# Allegro board gumstix_breakout_mask.brd
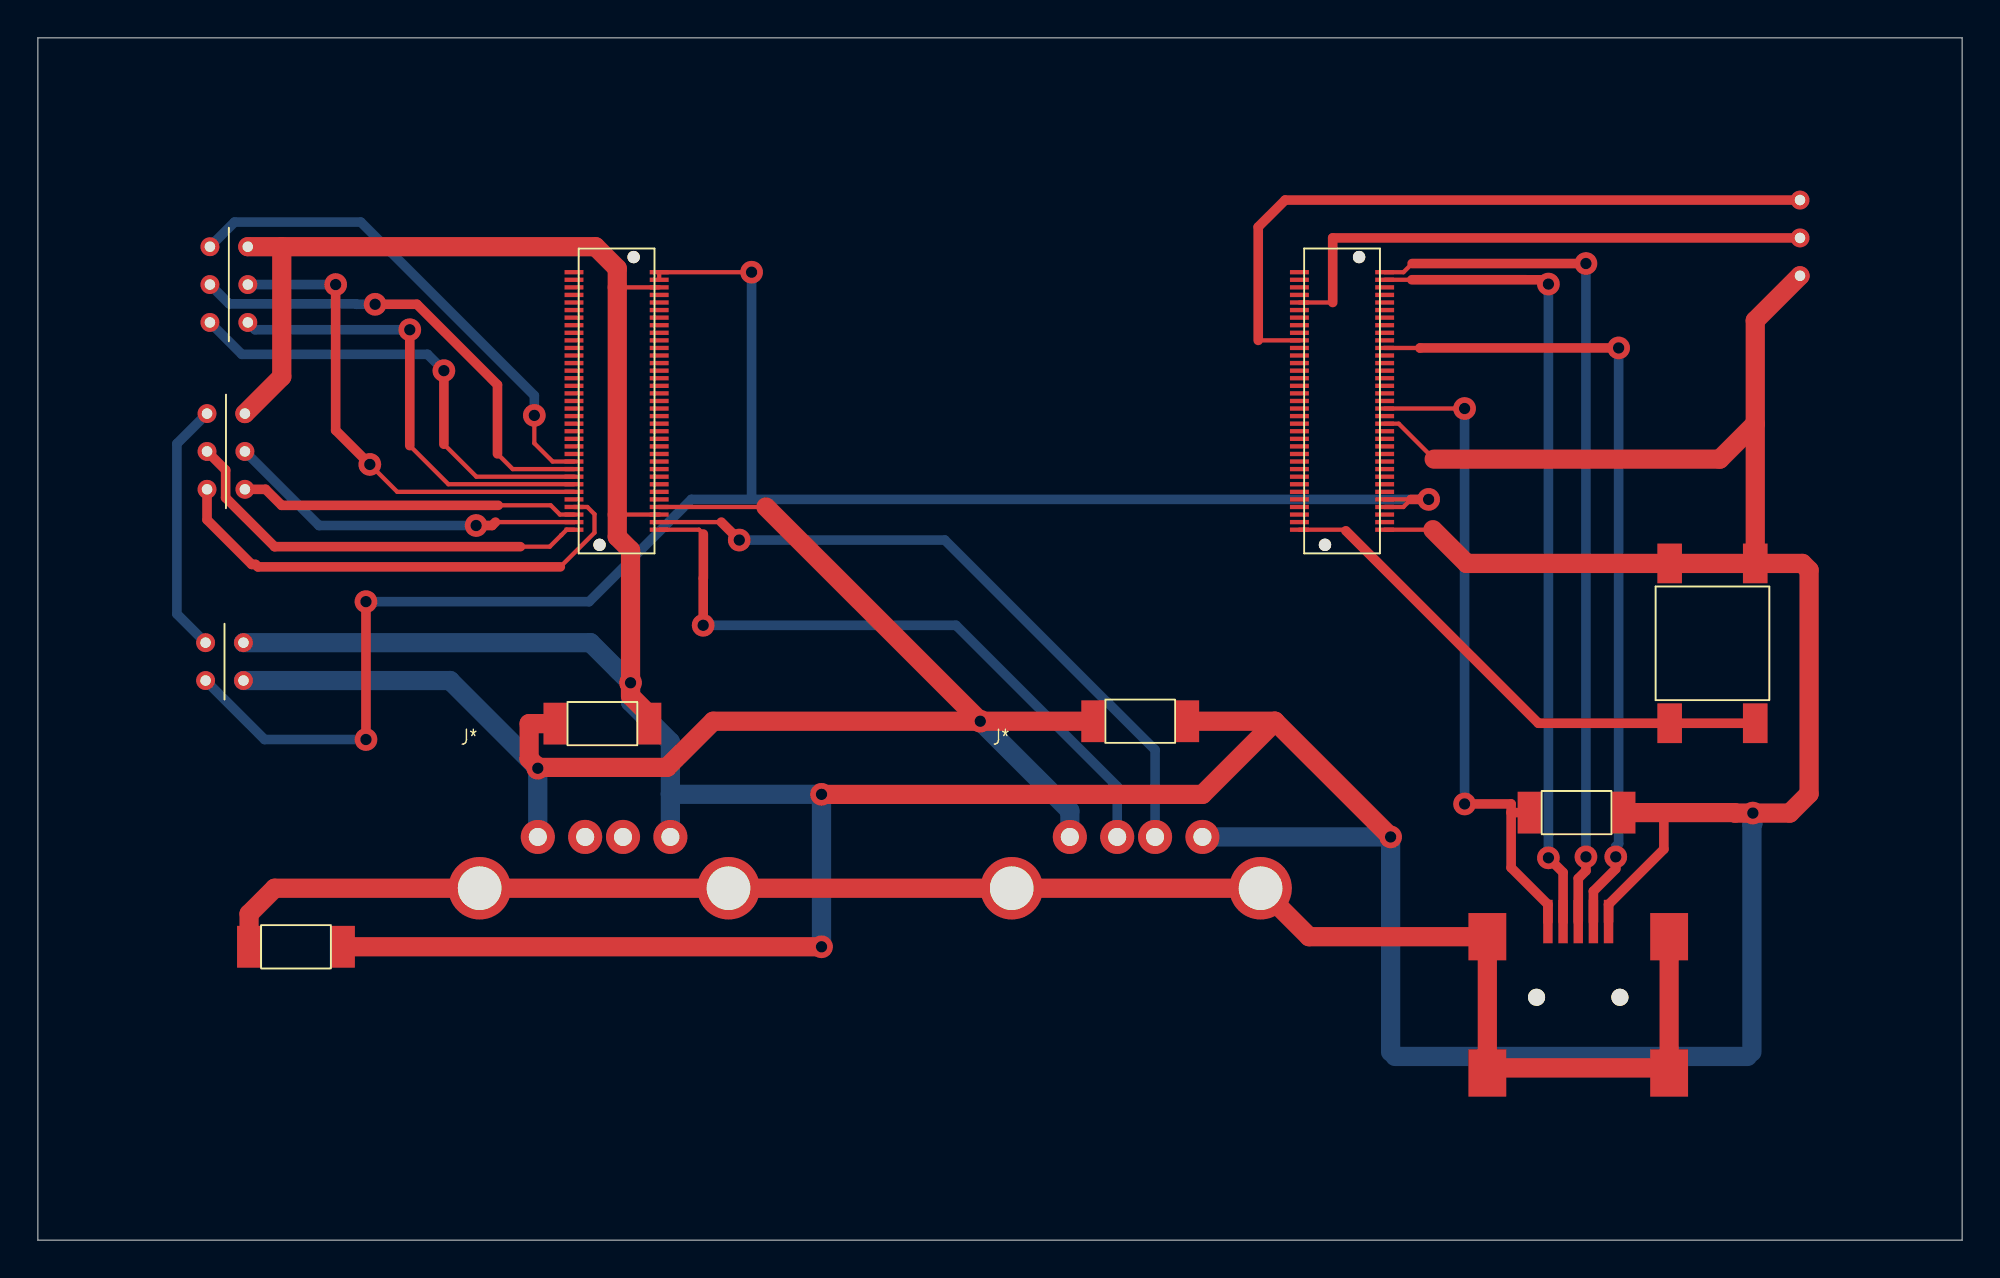
[diagram p0: board, top side]
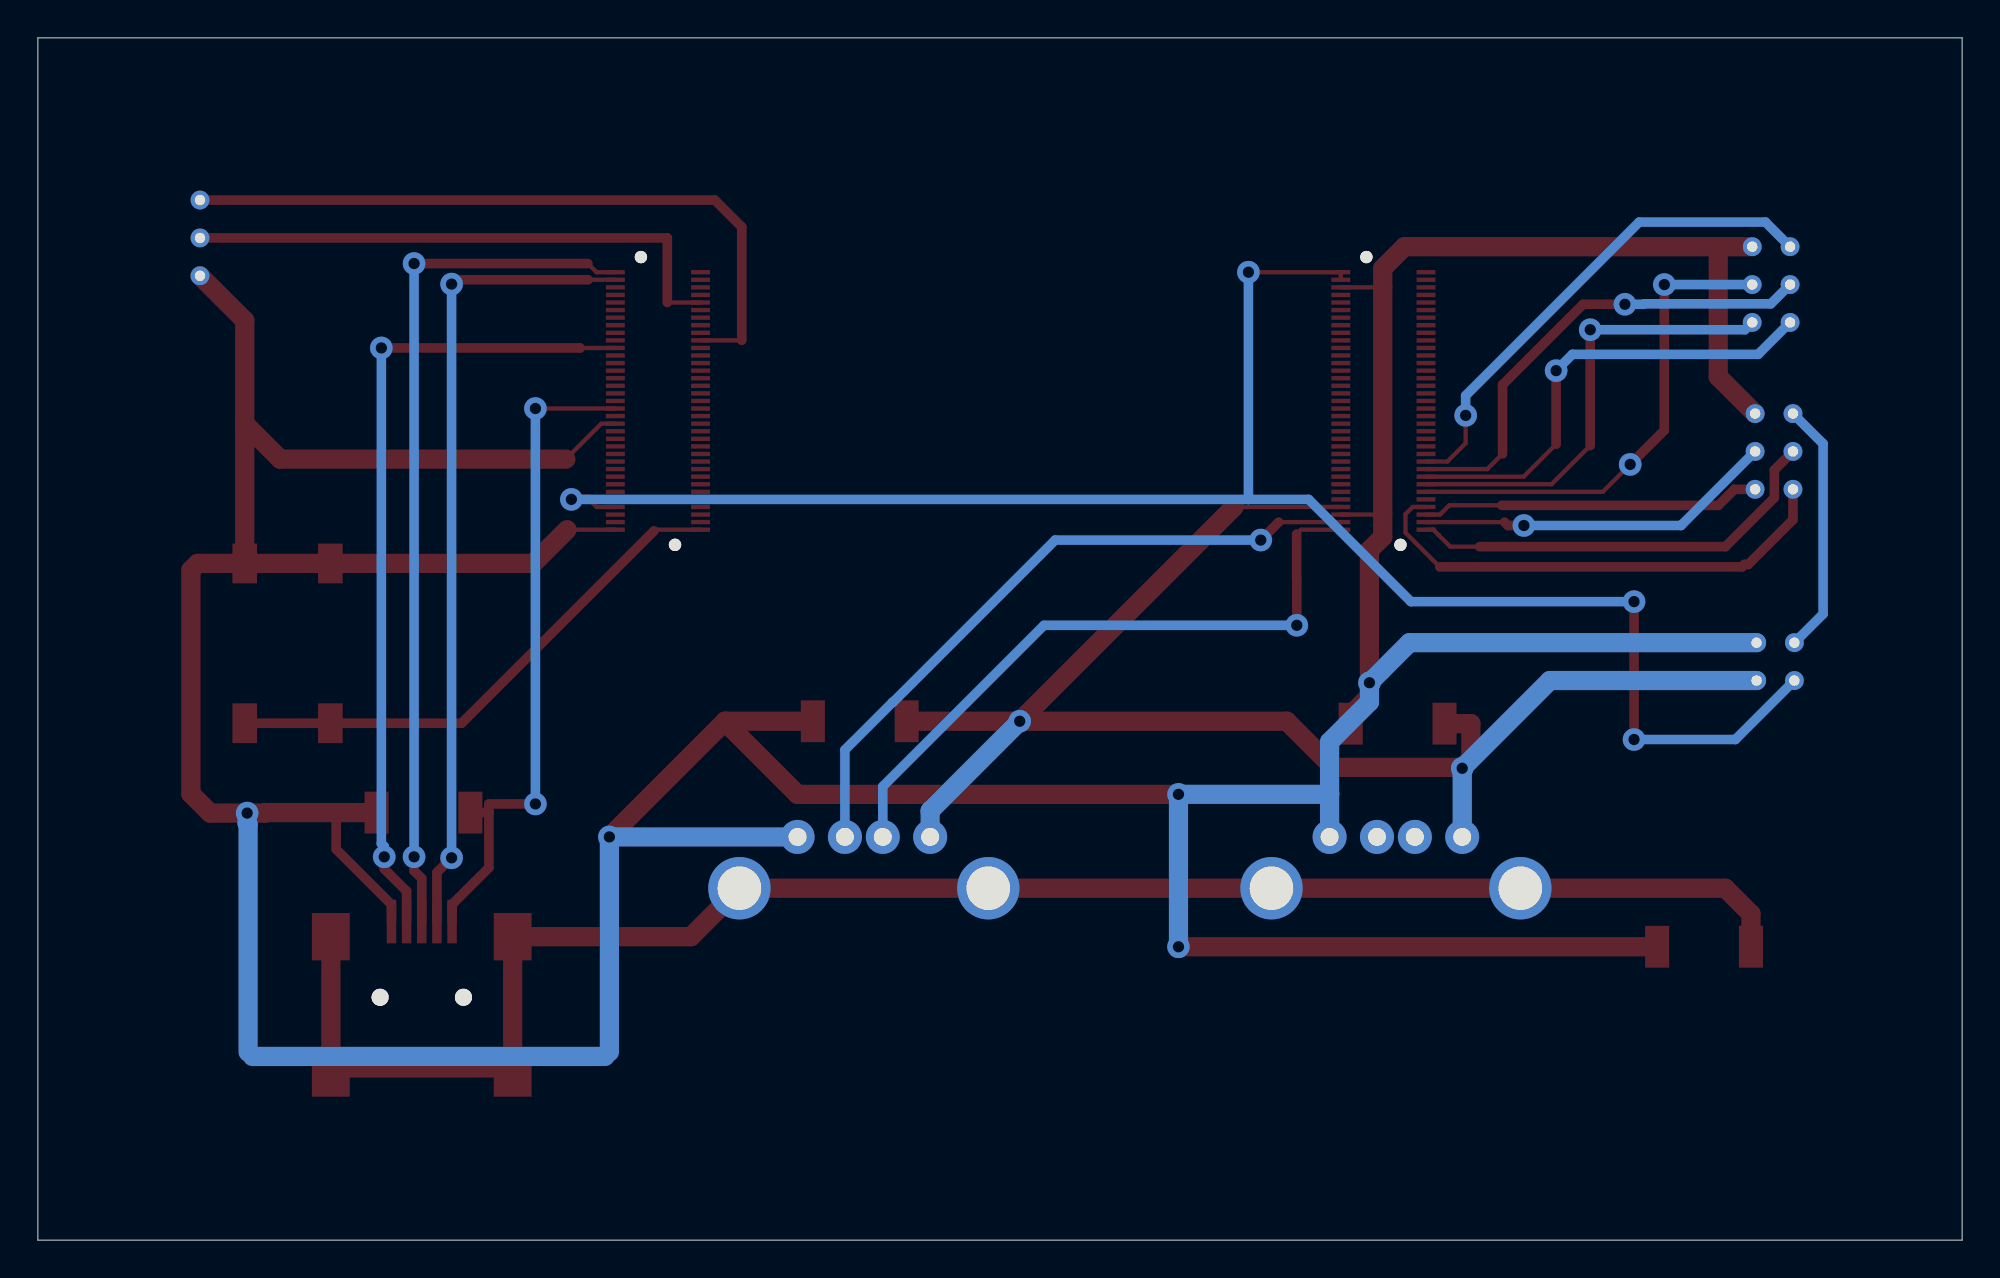
[diagram p1: board, bottom side, seen from below]

Outline 101.6 x 63.5 mm; copper layers: TOP, BOTTOM. Coordinates in mm from the lower left corner of the outline.
Outline path: 0,63.5 101.6,63.5 101.6,0 0,0 0,63.5

## Placement (name value [footprint] x y rotation side)
C1  1n  [SMDCAP]  13.69 15.49 0 top
C2  4.7u  [SMDCAP]  58.14 27.41 180 top
C3  4.7u  [SMDCAP]  29.74 27.28 180 top
C4  4.7u  [SMDCAP]  81.18 22.58 180 top
J1  GUMSTIX_J4  [GUMSTIX]  30.56 44.32 0 top
J2  GUMSTIX_J1  [GUMSTIX]  68.86 44.32 180 top
J3  CON6  [USBA]  57.99 14.05 0 top
J4  CON6  [USBA]  29.9 14.05 0 top
J5  CON9  [MUSBA_TSMT]  81.33 12.83 90 top
J6  CON6  [DIP6_CONN]  10.08 50.47 0 top
J7  CON3  [DIP3]  93.04 52.93 0 top
J8  CON6  [DIP6_CONN]  9.93 41.66 0 top
J9  CON4  [DIP4_CONN]  9.86 30.56 0 top
S1  -  [SWITCH]  88.42 31.52 270 top

## Library data of the parts
C1-C4 = C_elect_0: Tolerance: ***; User Part Number: ***
J1 = GUMSTIX_J4
J2 = GUMSTIX_J1
J3 J4 J6 J8 = CON6
J5 = CON9
J7 = CON3
J9 = CON4
S1 = SWITCH

## Footprints (pads in the part's own frame, mm; a bottom-side part is the same pattern mirrored in y, then rotated)
DIP3
  round 1 hole 0.55 unplated: (0,2) (0,0) (0,-2)
DIP4_CONN
  round 1 hole 0.55 unplated: (-1,1) (-1,-1) (1,1) (1,-1)
DIP6_CONN
  round 1 hole 0.55 unplated: (-1,2) (-1,0) (-1,-2) (1,2) (1,0) (1,-2)
GUMSTIX
  round 0.65 hole 0.65 unplated: (-0.9,-7.6) (0.9,7.6)
  rect 1x0.23 smd: 1(2.25,6.8) 2(2.25,6.4) 3(2.25,6) 4(2.25,5.6) 5(2.25,5.2) 6(2.25,4.8) 7(2.25,4.4) 8(2.25,4) 9(2.25,3.6) 10(2.25,3.2) 11(2.25,2.8) 12(2.25,2.4) 13(2.25,2) 14(2.25,1.6) 15(2.25,1.2) 16(2.25,0.8) 17(2.25,0.4) 18(2.25,0) 19(2.25,-0.4) 20(2.25,-0.8) 21(2.25,-1.2) 22(2.25,-1.6) 23(2.25,-2) 24(2.25,-2.4) 25(2.25,-2.8) 26(2.25,-3.2) 27(2.25,-3.6) 28(2.25,-4) 29(2.25,-4.4) 30(2.25,-4.8) 31(2.25,-5.2) 32(2.25,-5.6) 33(2.25,-6) 34(2.25,-6.4) 35(2.25,-6.8) 36(-2.25,-6.8) 37(-2.25,-6.4) 38(-2.25,-6) 39(-2.25,-5.6) 40(-2.25,-5.2) 41(-2.25,-4.8) 42(-2.25,-4.4) 43(-2.25,-4) 44(-2.25,-3.6) 45(-2.25,-3.2) 46(-2.25,-2.8) 47(-2.25,-2.4) 48(-2.25,-2) 49(-2.25,-1.6) 50(-2.25,-1.2) 51(-2.25,-0.8) 52(-2.25,-0.4) 53(-2.25,0) 54(-2.25,0.4) 55(-2.25,0.8) 56(-2.25,1.2) 57(-2.25,1.6) 58(-2.25,2) 59(-2.25,2.4) 60(-2.25,2.8) 61(-2.25,3.2) 62(-2.25,3.6) 63(-2.25,4) 64(-2.25,4.4) 65(-2.25,4.8) 66(-2.25,5.2) 67(-2.25,5.6) 68(-2.25,6) 69(-2.25,6.4) 70(-2.25,6.8)
MUSBA_TSMT
  round 0.9 hole 0.9 unplated: (0,2.2) (0,-2.2)
  rect 2.3x0.5 smd: 1(4,1.6) 2(4,0.8) 3(4,0) 4(4,-0.8) 5(4,-1.6)
  rect 2.5x2 smd: 6(-4,4.8) 7(-4,-4.8) 8(3.2,-4.8) 9(3.2,4.8)
SMDCAP
  rect 1.27x2.21 smd: 1(-2.54,0) 2(2.413,0)
SWITCH
  rect 2.1x1.3 smd: 1(-4.22,2.26) 2(-4.22,-2.26) 3(4.22,-2.26) 4(4.22,2.26)
USBA
  round 3.3 hole 2.3 unplated: (-6.57,4.54) (6.57,4.54)
  round 1.8 hole 0.95 unplated: (-3.5,7.25) (-1,7.25) (1,7.25) (3.5,7.25)

## Nets
GND: C1.2(-) C2.1(+) C3.1(+) C4.1(+) J1.3(GND#3) J1.33(GND#33) J2.56(GND#56) J2.70(GND#70) J5.5 S1.1 S1.2
VCC_3.3: J1.1(VSYSTEM#1) J1.2(VSYSTEM#2) J2.66(VSYSTEM#66) J2.67(VSYSTEM#67)
COMMON_SHIELD: C1.1(+) J5.6 J5.7 J5.8 J5.9
GPIO18: J1.38(GPIO23_MMC3_DAT5)
GPIO19: J1.36(GPIO19_MMC3_D1)
GPIO20: J1.39(GPIO20_MMC3_D2)
GPIO21: J1.37(GPIO22_MMC3_DAT6)
GPIO165_IR_RXD3: J2.31(GPIO165_IR_RXD3)
GPIO166_IR_TXD3: J2.26(GPIO166_IR_TXD3)
SPI_CLOCK_1.8V: J1.43(GPIO171_SPI1_CLK)
SPI_CS_1.8V: J1.42(GPIO175_SPI1_CS1)
SPI_INTERRUPT_1.8V: J1.41(GPIO114_SPI1_NIRQ)
SPI_MISO_1.8V: J1.45(GPIO173_SPI1_MISO)
SPI_MOSI_1.8V: J1.44(GPIO172_SPI1_MOSI)
USB_OTG_DM: J2.37(USBOTG_DM) J5.2
USB_OTG_DP: J2.36(USBOTG_DP) J5.3
USB_OTG_ID: J2.46(USBOTG_ID) J5.4
USB_OTG_VBUS: C4.2(-) J2.54(USBOTG_VBUS) J5.1
USBH_DM: J1.35(USBH_DM)
USBH_DP: J1.34(USBH_DP)
USBH_VBUS: C2.2(-) C3.2(-) J1.32(USBH_VBUS)
N00742: J2.1(NRESPWRON) S1.3 S1.4

Pads without a net: J1 4 5 6 7 8 9 10 11 12 13 14 15 16 17 18 19 20 21 22 23 24 25 26 27 28 29 30 31 40 46 47 48 49 50 51 52 53 54 55 56 57 58 59 60 61 62 63 64 65 66 67 68 69 70; J2 2 3 4 5 6 7 8 9 10 11 12 13 14 15 16 17 18 19 20 21 22 23 24 25 27 28 29 30 32 33 34 35 38 39 40 41 42 43 44 45 47 48 49 50 51 52 53 55 57 58 59 60 61 62 63 64 65 68 69

## Via types
v1: diameter 1.2, hole 0.6, TOP to BOTTOM, 28 vias

## Routing (per net, layer and track width the routed paths; a pad name or vN(x,y) marks a point on that pad's centre or on a via; arc(x,y) is an arc through that point)
GND: length 312.1
  TOP w0.229: J1.3 30.59,50.32 ; J2.70 73.66,37.52 ; J2.56 71.85,43.12 73.72,41.25 ; J1.33 30.59,38.32
  TOP w0.508: J5.5 82.93,17.73 85.85,20.65 85.85,22.58
  TOP w1.016: S1.1 93.16,35.74 93.52,35.39 93.52,23.58 92.5,22.56 v1(90.55,22.56) 89.61,22.56 89.59,22.58 C4.1 ; S1.1 90.68,43.12 ; S1.1 S1.2 75.44,35.74 73.66,37.52 ; 12.88,52.47 29.44,52.47 30.59,51.32 30.59,37.14 31.29,36.44 v1(31.29,29.44) 31.29,28.74 32.28,27.75 C3.1 ; 12.88,52.47 12.88,45.6 10.93,43.66 ; 12.88,52.47 11.08,52.47 ; 65.31,27.41 v1(71.42,21.3) ; 65.31,27.41 65.31,27.37 61.49,23.54 41.37,23.54 v1(41.38,23.55) ; 65.31,27.41 C2.1 ; 93.04,50.93 90.68,48.57 90.68,43.12 ; 90.68,43.12 88.8,41.25 73.72,41.25 ; C1.2 v1(41.38,15.49)
  BOTTOM w0.229: 71.42,9.93 71.65,9.7 ; 90.27,9.7 90.5,9.93
  BOTTOM w1.016: 71.65,9.7 90.27,9.7 ; v1(41.38,15.49) v1(41.38,23.55) 33.41,23.55 33.4,23.56 ; 33.4,21.3 33.4,23.56 ; 33.4,23.56 33.4,26.32 31.29,28.42 v1(31.29,29.44) 29.18,31.56 10.86,31.56 ; v1(90.55,22.56) 90.55,22.01 90.5,21.96 90.5,9.93 ; 71.42,9.93 v1(71.42,21.3) 61.49,21.3
VCC_1.8: length 13.4
  BOTTOM w0.508: 8.86,31.56 7.34,33.07 7.34,42.07 8.93,43.66
VCC_3.3: length 96.5
  TOP w0.229: J2.66 72.5,39.12 72.1,38.72 J2.67 ; v1(37.68,51.12) J1.1 J1.2
  TOP w0.508: 72.5,39.12 v1(73.43,39.12) ; v1(17.32,33.72) v1(17.32,26.44)
  BOTTOM w0.508: v1(17.32,33.72) 29.1,33.72 34.5,39.12 37.68,39.12 ; 8.86,29.56 11.97,26.44 v1(17.32,26.44) ; 37.68,39.12 v1(73.43,39.12) ; 37.68,39.12 v1(37.68,51.12)
COMMON_SHIELD: length 92.9
  TOP w1.016: 86.13,9.09 76.8,9.09 J5.6 J5.9 67.12,16.03 64.56,18.59 12.5,18.59 11.15,17.23 C1.1 ; 86.13,9.09 J5.7 ; 86.13,9.09 J5.8
GPIO18: length 17.9
  TOP w0.229: 24.31,38.81 27.08,38.81 27.56,38.32 J1.38
  TOP w0.508: 10.93,39.66 12.02,39.66 12.87,38.81 24.31,38.81
GPIO19: length 22.7
  TOP w0.229: J1.36 27.92,37.52 27.64,37.24 27.64,37.24 27.03,36.63 25.48,36.63
  TOP w0.508: 25.48,36.63 12.5,36.63 9.91,39.21 9.91,40.67 8.93,41.66
GPIO20: length 26.1
  TOP w0.229: J1.39 29.01,38.72 29.39,38.34 29.39,37.37 27.58,35.56
  TOP w0.508: 27.58,35.56 11.62,35.56 11.49,35.69 11.29,35.69 8.93,38.05 8.93,39.66
GPIO21: length 19.1
  TOP w0.229: J1.37 24.16,37.92
  TOP w0.508: v1(23.14,37.74) 23.98,37.74 24.16,37.92
  BOTTOM w0.508: v1(23.14,37.74) 14.84,37.74 10.93,41.66
GPIO165_IR_RXD3: length 29.8
  TOP w0.229: J2.31 68.37,49.52
  TOP w0.508: 93.04,52.93 68.37,52.93 68.37,49.52
GPIO166_IR_TXD3: length 37.4
  TOP w0.229: J2.26 64.43,47.52
  TOP w0.508: 93.04,54.93 65.86,54.93 64.43,53.51 64.43,47.52
SPI_CLOCK_1.8V: length 24.9
  TOP w0.229: J1.43 23.15,40.32 21.44,42.04
  TOP w0.508: v1(21.44,45.92) 21.44,42.04
  BOTTOM w0.508: 9.08,48.47 10.77,46.79 20.58,46.79 v1(21.44,45.92)
SPI_CS_1.8V: length 24.3
  TOP w0.229: 19.64,41.96 21.68,39.92 J1.42
  TOP w0.508: v1(19.64,48.08) 19.64,41.96
  BOTTOM w0.508: v1(19.64,48.08) 11.47,48.08 11.08,48.47
SPI_INTERRUPT_1.8V: length 26.3
  TOP w0.229: v1(17.53,40.97) 18.97,39.52 J1.41
  TOP w0.508: v1(15.72,50.47) 15.72,42.77 v1(17.53,40.97)
  BOTTOM w0.508: 11.08,50.47 v1(15.72,50.47)
SPI_MISO_1.8V: length 26.5
  TOP w0.229: J1.45 27.18,41.12 26.21,42.09 v1(26.21,43.56)
  BOTTOM w0.508: v1(26.21,43.56) 26.21,44.61 17.05,53.77 10.38,53.77 9.08,52.47
SPI_MOSI_1.8V: length 25.4
  TOP w0.229: 24.27,41.53 25.07,40.72 J1.44
  TOP w0.508: 24.27,41.53 24.27,45.17 20.01,49.43 v1(17.81,49.43)
  BOTTOM w0.508: v1(17.81,49.43) 16.82,49.43 16.8,49.45 10.1,49.45 9.08,50.47
USB_OTG_DM: length 42.7
  TOP w0.229: J2.37 72.54,50.72
  TOP w0.508: v1(79.76,20.19) 80.53,19.42 J5.2 ; v1(79.76,50.5) 79.53,50.72 72.54,50.72
  BOTTOM w0.508: v1(79.76,50.5) v1(79.76,20.19)
USB_OTG_DP: length 45.7
  TOP w0.229: 72.56,51.58 72.1,51.12 J2.36
  TOP w0.508: 72.56,51.58 v1(81.74,51.58) ; J5.3 81.33,19.1 81.74,19.51 v1(81.74,20.24)
  BOTTOM w0.508: v1(81.74,51.58) v1(81.74,20.24)
USB_OTG_ID: length 43.2
  TOP w0.229: 72.97,47.12 72.97,47.12 J2.46
  TOP w0.508: v1(83.31,20.24) 83.31,19.61 82.13,18.43 J5.4 ; v1(83.46,47.12) 72.98,47.12 72.97,47.12
  BOTTOM w0.508: v1(83.46,47.12) 83.46,20.94 83.31,20.79 v1(83.31,20.24)
USB_OTG_VBUS: length 35.6
  TOP w0.229: J2.54 v1(75.33,43.92)
  TOP w0.508: 77.79,22.58 77.79,23.04 v1(75.33,23.04) ; 77.79,22.58 77.79,19.67 79.73,17.73 J5.1 ; 77.79,22.58 C4.2
  BOTTOM w0.508: v1(75.33,43.92) v1(75.33,23.04)
USBH_DM: length 35.3
  TOP w0.229: J1.35 34.91,37.52 35.14,37.29 ; 35.13,34.95 35.14,34.96
  TOP w0.508: v1(35.13,32.47) 35.13,34.95 ; 35.14,34.96 35.14,37.29
  BOTTOM w0.508: v1(35.13,32.47) 48.48,32.47 56.99,23.96 56.99,21.3
USBH_DP: length 35.8
  TOP w0.229: J1.34 36.09,37.92
  TOP w0.508: 36.09,37.92 v1(37.03,36.98)
  BOTTOM w0.508: 58.99,21.3 58.99,25.89 56.47,28.41 56.45,28.41 47.89,36.98 v1(37.03,36.98)
USBH_VBUS: length 85.1
  TOP w0.229: J1.32 38.44,38.72
  TOP w1.016: v1(49.76,27.41) 35.66,27.41 33.22,24.97 26.4,24.97 ; v1(49.76,27.41) 38.44,38.72 ; v1(49.76,27.41) C2.2 ; 26.4,24.97 25.94,25.43 25.94,27.28 C3.2 ; 26.4,24.97 v1(26.4,24.92)
  BOTTOM w1.016: v1(49.76,27.41) 54.49,22.68 54.49,21.3 ; 10.86,29.56 21.76,29.56 v1(26.4,24.92) 26.4,21.3
N00742: length 28.3
  TOP w0.229: 69.06,37.47 69,37.52 J2.1
  TOP w0.508: 69.06,37.47 79.23,27.3 S1.3 S1.4
